# Altium PCB TIPD164_PCB.PcbDoc
Units mil, origin at the board's own origin, x right, y up, seen from the top; angles counter-clockwise.
Board outline 3000 x 3000 mil, 4 copper layers (Top Layer, Mid-Layer 1, Mid-Layer 2, Bottom Layer); 85 components, 50 nets, 262 pads, 186 vias.
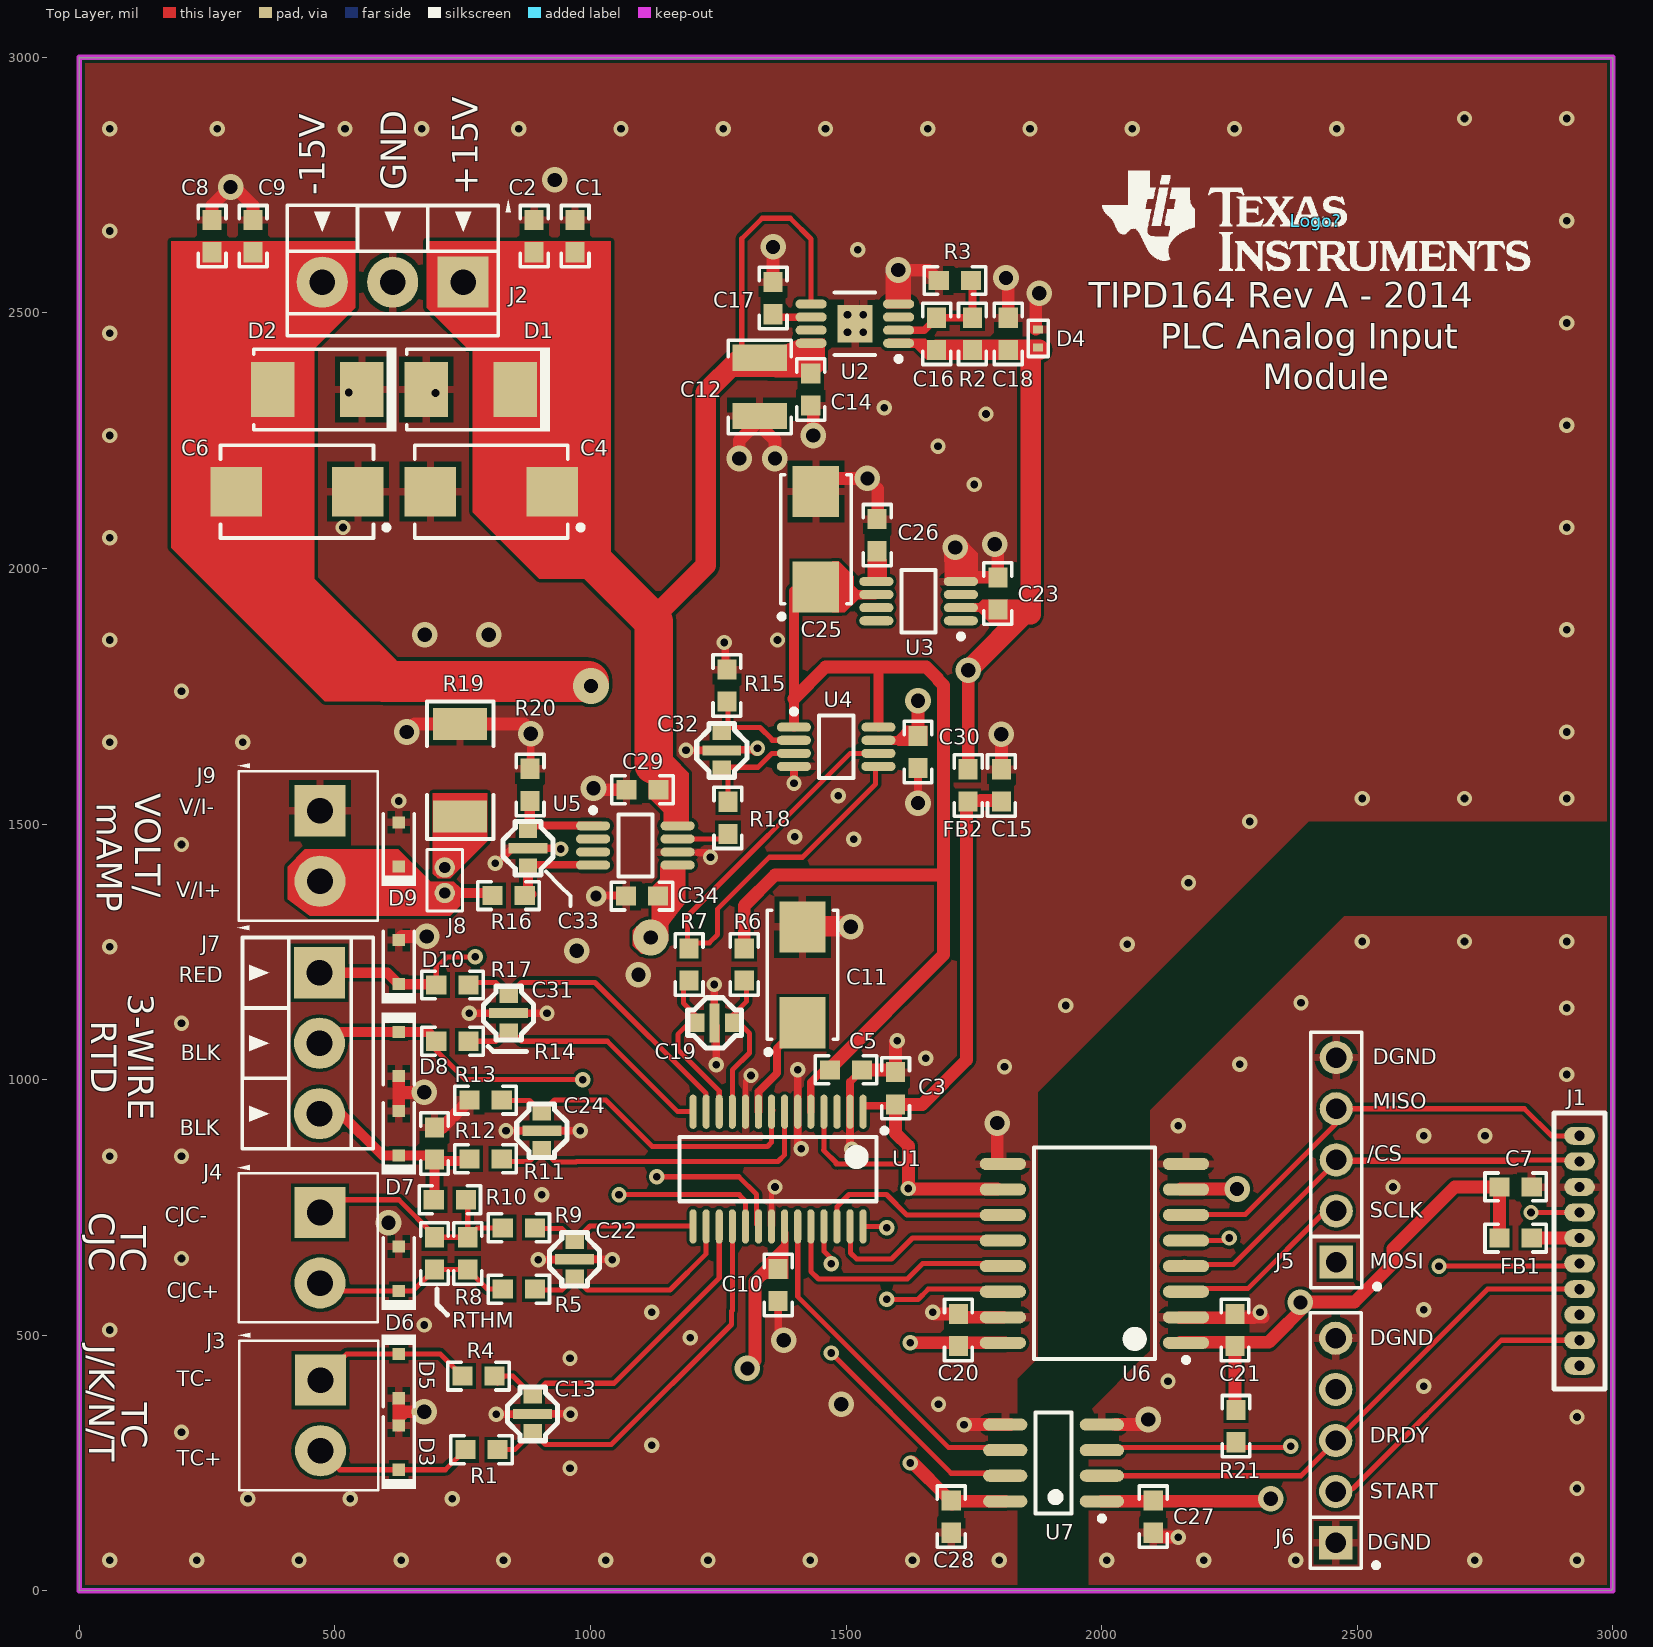
[diagram p0: Top Layer view]
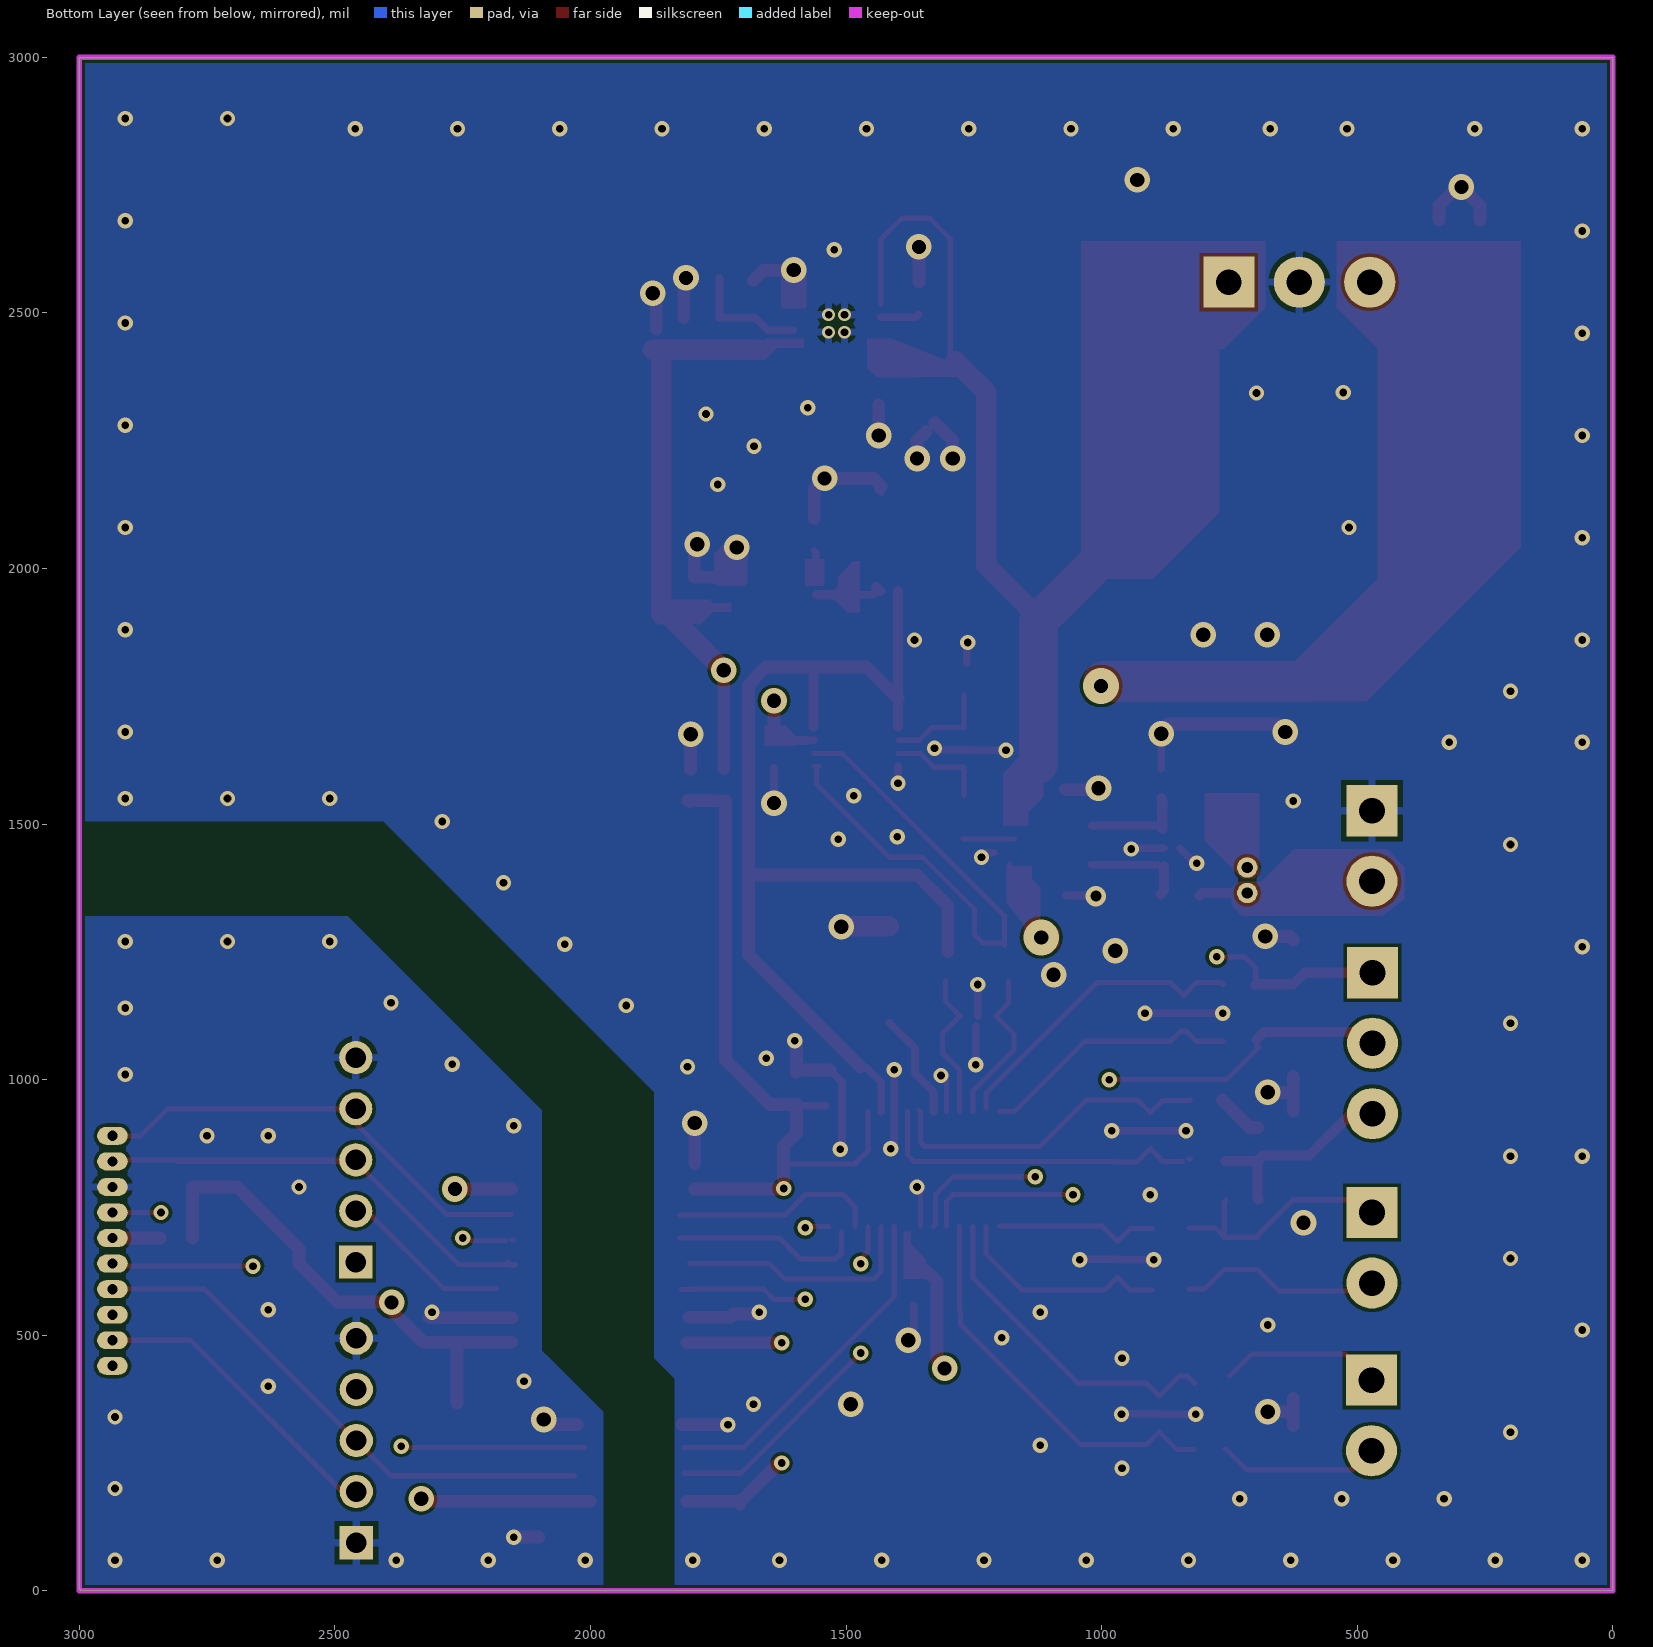
[diagram p1: Bottom Layer view, seen from below]
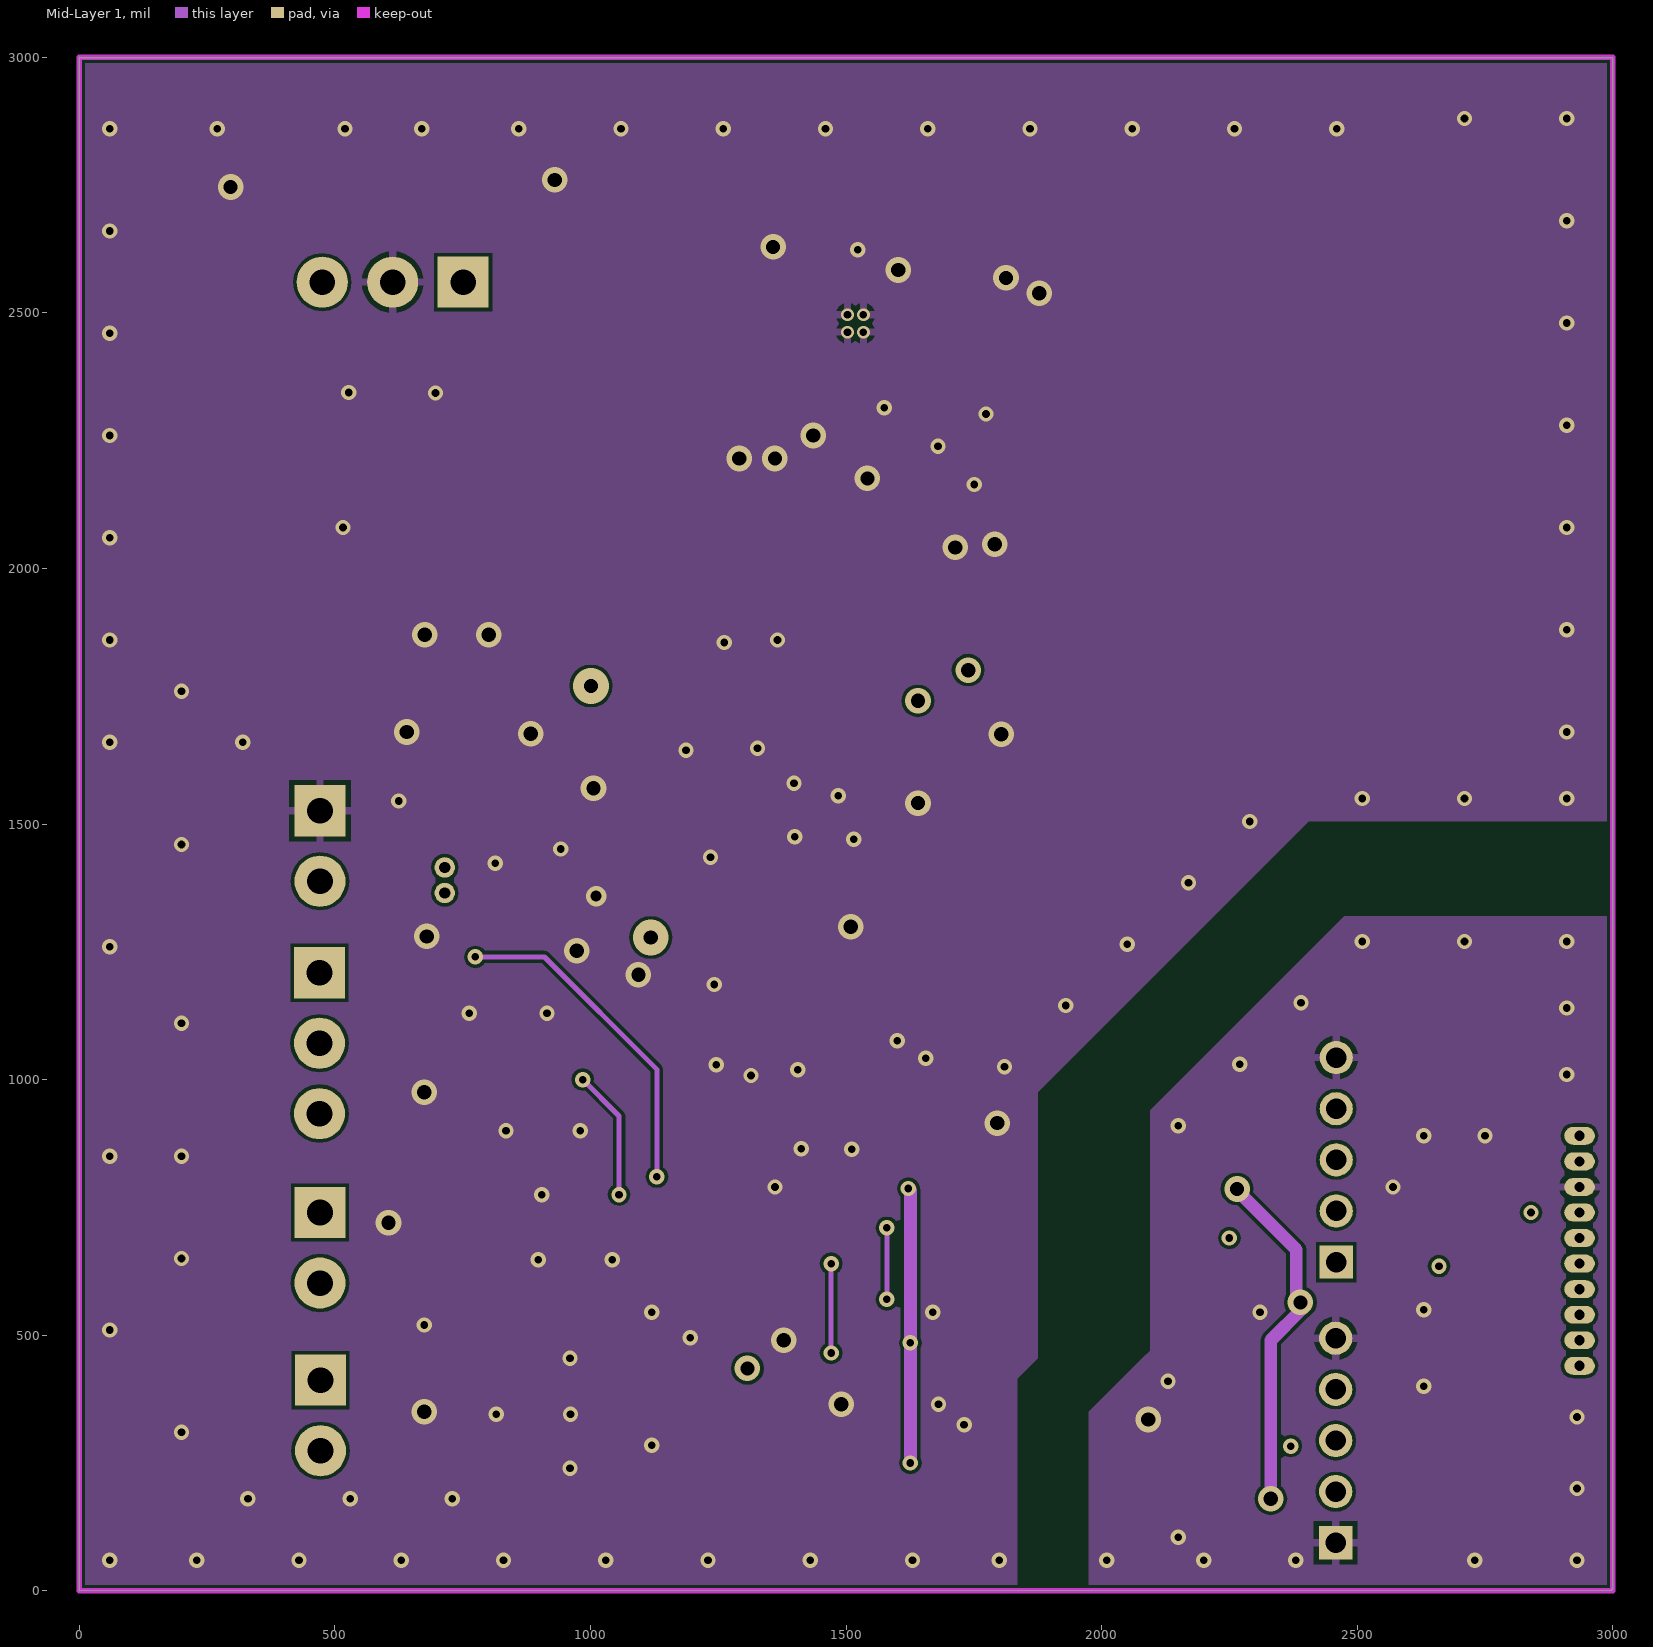
[diagram p2: Mid-Layer 1]
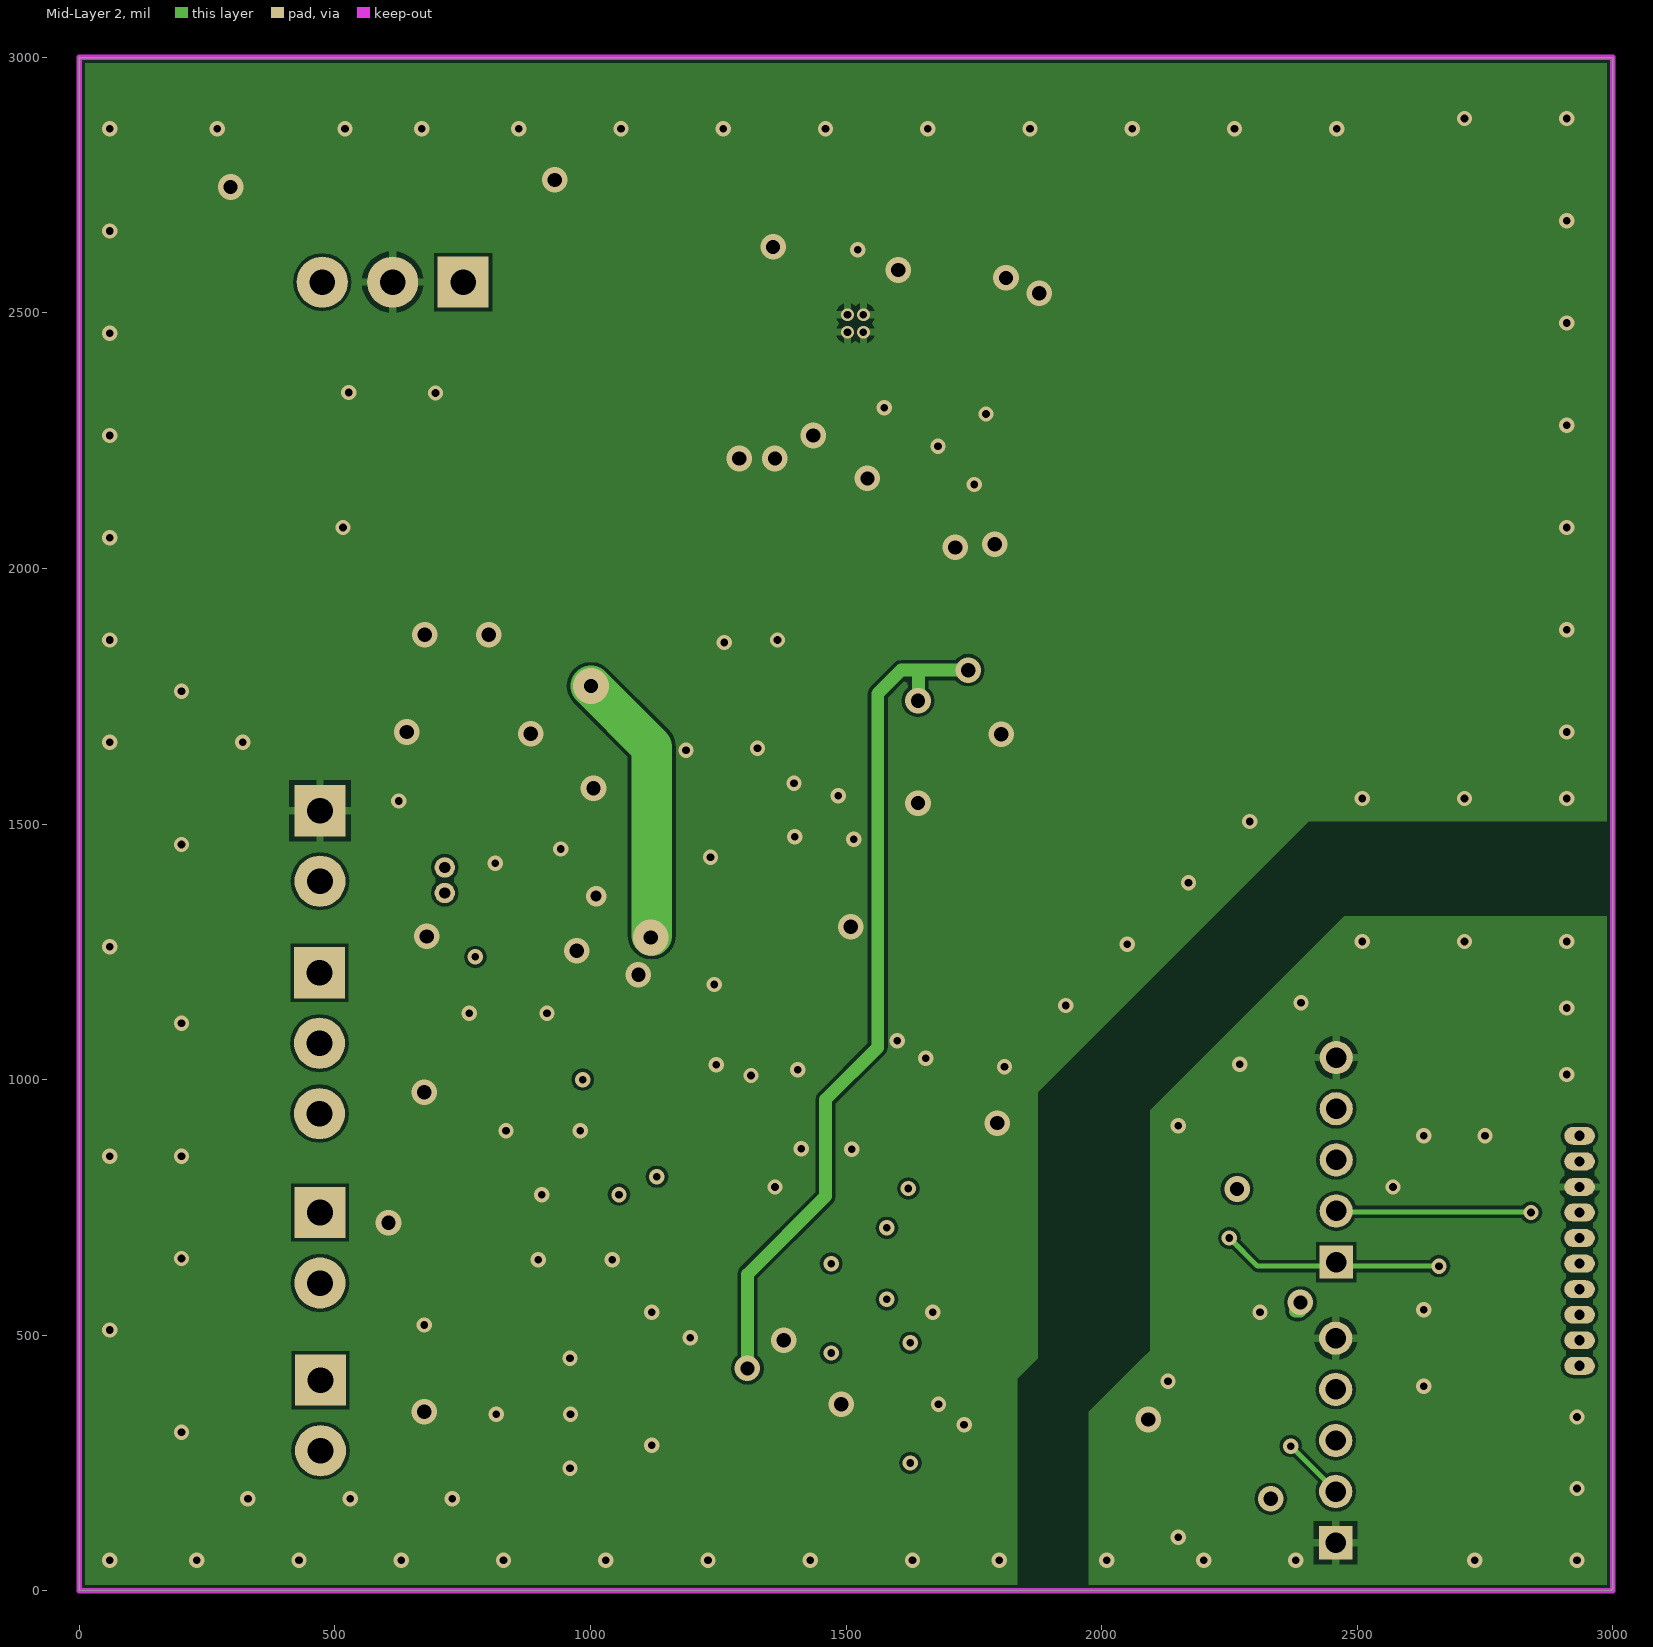
[diagram p3: Mid-Layer 2]

## Layer stack, top to bottom
Top Layer: signal copper 1.4
Dielectric: core 12.6, FR-4, Dk 4.8
Mid-Layer 1: signal copper 1.4
Dielectric: prepreg 12.6, FR-4, Dk 4.8
Mid-Layer 2: signal copper 1.4
Dielectric: core 12.6, FR-4, Dk 4.8
Bottom Layer: signal copper 1.4

## Board outline
2997,1 3000,4 3000,2999 1,2999 0,3000 0,0

## Design rules (kind name [scope] priority, off if disabled: settings)
Clearance [All] p1: gap=6.5
HoleToHoleClearance [All] p1: gap=0 allowstackedmicrovias=TRUE
MinimumSolderMaskSliver [All] p1: minsoldermaskwidth=0
PolygonConnect PolygonConnect_1 [(InComponentClass('All Components'))] p1: connectstyle=Relief reliefconductorwidth=15 reliefentries=4 polygonreliefangle="90 Angle" airgapwidth=10
PolygonConnect [All] p2: connectstyle=Direct reliefconductorwidth=20 reliefentries=4 polygonreliefangle="90 Angle" airgapwidth=10
RoutingVias [All] p1: holewidth=15 width=30 viastyle="Through Hole" minholewidth=15 minwidth=30 maxholewidth=28 maxwidth=50
SilkToSilkClearance [All] p1 off: silktosilkclearance=10
SilkscreenOverComponentPads [All] p1 off: minsilkscreentomaskgap=10
SolderMaskExpansion [All] p1: expansion=4
Width [All] p1: maxlimit=200 minlimit=10 preferedwidth=10
24 further rules are at their usual default settings.

## Classes and differential pairs
component class Header: J5 J6
component class Logo: Logo?

## Components (designator, comment, footprint, x,y, rotation, side; value= is the part's Value field where it differs from the comment)
C1 "GRM188R71H104KA93D" 0603 970,2650 r270 top
C2 "06035A101JAT2A" 0603 890,2650 r90 top
C3 "GRM188R71H104KA93D" 0603 1597,983 r90 top
C4 "293D106X9050E2TE3" 7343-43 806,2150 r180 top
C5 "GRM188R71H104KA93D" 0603 1500,1019 r0 top
C6 "293D106X9050E2TE3" 7343-43 426,2150 r180 top
C7 "GRM188R71H104KA93D" 0603 2810,790 r0 top
C8 "GRM188R71H104KA93D" 0603 260,2650 r90 top
C9 "06035A101JAT2A" 0603 340,2650 r270 top
C10 "GRM188R71H104KA93D" 0603 1367.2,598 r270 top
C11 "293D226X9010C2TE3" 6032-28 1415,1205 r90 top
C12 "C3225X7R1E106M" 1210 1331,2355 r270 top
C13 "0.047uF X2Y" X2Y_0603 887,346 r90 top
C14 "GRM188R71H104KA93D" 0603 1431,2350 r270 top
C15 "GRM188R71H104KA93D" 0603 1804,1575.5 r90 top
C16 "C0603C103J5RACTU" 0603 1677.37,2458.81 r90 top
C17 "C0603C103J5RACTU" 0603 1357.37,2528.81 r90 top
C18 "GRM188R71H104KA93D" 0603 1817.37,2458.81 r90 top
C19 "0.047uF X2Y" X2Y_0603 1243,1111 r0 top
C20 "GRM188R71H104KA93D" 0603 1720,510 r90 top
C21 "GRM188R71H104KA93D" 0603 2261,510 r90 top
C22 "0.047uF X2Y" X2Y_0603 969,648.5 r90 top
C23 "GRM188R71H104KA93D" 0603 1797,1951 r90 top
C24 "0.047uF X2Y" X2Y_0603 905,900 r90 top
C25 "293D226X9010C2TE3" 6032-28 1441,2057 r90 top
C26 "GRM188R71H104KA93D" 0603 1561,2065 r90 top
C27 "GRM188R71H104KA93D" 0603 2101,145 r270 top
C28 "GRM188R71H104KA93D" 0603 1706,145 r270 top
C29 "GRM188R71H104KA93D" 0603 1102,1567 r180 top
C30 "GRM188R71H104KA93D" 0603 1640.8,1641 r270 top
C31 "0.047uF X2Y" X2Y_0603 840,1130 r90 top
C32 "0.047uF X2Y" X2Y_0603 1257,1644 r270 top
C33 "0.047uF X2Y" X2Y_0603 878,1452.5 r90 top
C34 "GRM188R71H104KA93D" 0603 1101,1359 r180 top
D1 "SMBJ15A-13-F" SMB 766,2350 r180 top
D2 "SMBJ15A-13-F" SMB 466,2350 r180 top
D3 "DESD5V0S1BA" SOD-323 625,280 r90 top
D4 "ESD9L5.0ST5G" SOD-923 1876,2450 r270 top
D5 "DESD5V0S1BA" SOD-323 625,420 r270 top
D6 "DESD5V0S1BA" SOD-323 625,630 r90 top
D7 "DESD5V0S1BA" SOD-323 625,895 r90 top
D8 "DESD5V0S1BA" SOD-323 625,1050 r270 top
D9 "CDSOD323-T15SC" sod-323 625,1460 r90 top
D10 "DESD5V0S1BA" SOD-323 625,1230 r90 top
FB1 "BLM18HG601SN1D" 0603 2810,690 r180 top
FB2 "BLM18HG601SN1D" 0603 1739,1575.5 r270 top
J1 "851-43-050-20-001000" 851-43-010-20-001000 2935,665 r180 top
J2 "ED555/3DS" TERM_BLK_ED555-3DS 751,2560 r180 top
J3 "ED555/2DS" TERM_BLK_ED555-2DS 472,412 r270 top
J4 "ED555/2DS" TERM_BLK_ED555-2DS 471,740 r270 top
J5 "TSW-105-07-G-S" TSW-105-07-G-S 2459,843 r90 top
J6 "TSW-105-07-G-S" TSW-105-07-G-S 2458,294 r90 top
J7 "ED555/3DS" TERM_BLK_ED555-3DS 470,1209 r270 top
J8 "TMS-102-02-G-S" "50mil Header" 715,1365 r90 top
J9 "ED555/2DS" TERM_BLK_ED555-2DS 471,1526 r270 top
Logo? "Texas Instruments" TI_Stacked_Overlay_Small 2420,2680 r0 top
R1 "CRCW0603249RFKEA" 0603 787,276 r180 top
R2 "ERA-3AEB1653V" 0603 1747.37,2458.81 r90 top
R3 "RG1608P-5112-B-T5" 0603 1713,2563.19 r0 top
R4 "CRCW0603249RFKEA" 0603 781,420 r180 top
R5 "RG1608P-2490-B-T5" 0603 860,590 r180 top
R6 "CRCW0603249RFKEA" 0603 1301,1225 r270 top
R7 "CRCW0603249RFKEA" 0603 1193,1225 r270 top
R8 "RG1608P-202-B-T5" 0603 760,660 r270 top
R9 "RG1608P-2490-B-T5" 0603 860,710 r180 top
R10 "CRCW06030000Z0EA" 0603 725,765 r0 top
R11 "CRCW0603249RFKEA" 0603 795,845 r180 top
R12 "RG2012V-822-P-T1" 0603 695,875 r90 top
R13 "CRCW0603249RFKEA" 0603 795,960 r180 top
R14 "CRCW0603249RFKEA" 0603 730,1075 r180 top
R15 "MCT06030C1008FP500" 0603 1267,1771 r270 top
R16 "CRCW0603249RFKEA" 0603 840,1360 r0 top
R17 "CRCW0603249RFKEA" 0603 730,1185 r180 top
R18 "MCT06030C1008FP500" 0603 1269,1512 r90 top
R19 "RT2010BKC07249RL" 2010 745,1605 r270 top
R20 "CRCW0603249RFKEA" 0603 882,1576.5 r270 top
R21 "CRCW0603100KFKEA" 0603 2263,322 r90 top
RTHM "NTCS0603E3473FHT" 0603 695,660 r270 top
U1 "ADS1248" MTC28_N 1367.2,825 r270 top
U2 "TPS7A4901" MUY08A_N 1517.37,2478.81 r180 top
U3 "REF5025" MUA08A_N 1642,1936 r180 top
U4 "INA159" MUA08A_N 1480.8,1651 r0 top
U5 "INA826" MUA08A_N 1088,1458 r0 top
U6 "ISO7641FCDW" M16B_N 1986,660 r180 top
U7 "ISO7221BD" D0008A_N 1906,250 r180 top

## Footprints (in the part's own frame and the unit in brackets; to place one, negate y for a bottom-side part, rotate by r counter-clockwise, add the part's x,y. Pads: shape width x height; smd on the part's side, far side on the other; paste and mask are expansions set on the pad)
"50mil Header" [mil]
  round 40 hole 22: 1(0,0) 2(50,0)
  silkscreen extent -35,-35 85,35
0603 [mm] "0603 from SM-752 data"
  rect 1x0.95 smd: 1(-0.8,0) 2(0.8,0)
  silkscreen extent -1.52,-0.69 1.52,0.69, body extent -0.87,-0.47 0.87,0.47, height 0.85
851-43-010-20-001000 [mil] "Female 10 Pin connector for SM-USB-DIG"
  oval 60x35 hole 20: 1(0,225) 2(0,175) 3(0,125) 4(0,75) 5(0,25) 6(0,-25) 7(0,-75) 8(0,-125) 9(0,-175) 10(0,-225)
  silkscreen extent -50,-270 50,270, body extent -210,-257 8,257, height 87
1210 [mm] "1210 from SM-752 data"
  rect 1.3x2.7 smd: 1(-1.45,0) 2(1.45,0)
  silkscreen extent -2.32,-1.57 2.32,1.57, body extent -1.7,-1.35 1.7,1.35, height 1.35
2010 [mm] "Chip Capacitor, Body 5.08x2.54mm, IPC Medium Density"
  rect 1.6x2.7 smd: 1(-2.3,0) 2(2.3,0)
  silkscreen extent -3.42,-1.65 3.42,1.65, body extent -2.73,-1.45 2.73,1.45, height 1.66
6032-28 [mm] "Medium Density IPC based on Vishay Sprague 293D datasheet."
  rect 2.55x2.3 smd: 1(-2.375,0) 2(2.375,0)
  silkscreen extent -3.96,-1.75 3.2,1.82, body extent -3.15,-1.75 3.15,1.75, height 2.8
7343-43 [mm] "Medium density IPC based on Kemet T495 series"
  rect 2.55x2.45 smd: 1(-3.025,0) 2(3.025,0)
  silkscreen extent -4.56,-2.3 3.8,2.3, body extent -3.8,-2.3 3.8,2.3, height 4.3
D0008A_N [mm] "SOIC, 8-Leads, Body 4.9x3.9mm, Pitch 1.27mm, IPC Medium Density"
  oval 2.2x0.6 smd: 1(-2.4,1.905) 2(-2.4,0.635) 3(-2.4,-0.635) 4(-2.4,-1.905) 5(2.4,-1.905) 6(2.4,-0.635) 7(2.4,0.635) 8(2.4,1.905)
  silkscreen extent -2.53,-2.5 0.9,2.88, body extent -2,-2.5 2,2.5, height 1.75
M16B_N [mm] "SOIC, 16-Leads, Body 10.3x7.5mm, Pitch 1.27mm, IPC Medium Density"
  oval 2.3x0.6 smd: 1(-4.55,4.445) 2(-4.55,3.175) 3(-4.55,1.905) 4(-4.55,0.635) 5(-4.55,-0.635) 6(-4.55,-1.905) 7(-4.55,-3.175) 8(-4.55,-4.445) 9(4.55,-4.445) 10(4.55,-3.175) 11(4.55,-1.905) 12(4.55,-0.635) 13(4.55,0.635) 14(4.55,1.905) 15(4.55,3.175) 16(4.55,4.445)
  silkscreen extent -4.67,-5.25 3,5.42, body extent -3.75,-5.25 3.75,5.25, height 2.65
MTC28_N [mm] "TSOP, 28-Leads, Body 9.7x4.4mm, Pitch 0.65mm, IPC Medium Density"
  oval 1.7x0.35 smd: 1(-2.85,4.225) 2(-2.85,3.575) 3(-2.85,2.925) 4(-2.85,2.275) 5(-2.85,1.625) 6(-2.85,0.975) 7(-2.85,0.325) 8(-2.85,-0.325) 9(-2.85,-0.975) 10(-2.85,-1.625) 11(-2.85,-2.275) 12(-2.85,-2.925) 13(-2.85,-3.575) 14(-2.85,-4.225) 15(2.85,-4.225) 16(2.85,-3.575) 17(2.85,-2.925) 18(2.85,-2.275) 19(2.85,-1.625) 20(2.85,-0.975) 21(2.85,-0.325) 22(2.85,0.325) 23(2.85,0.975) 24(2.85,1.625) 25(2.85,2.275) 26(2.85,2.925) 27(2.85,3.575) 28(2.85,4.225)
  silkscreen extent -2.03,-4.9 1.6,5.41, body extent -2.25,-4.9 2.25,4.9, height 1.1
MUA08A_N [mm] "TSOP, 8-Leads, Body 3x3mm, Pitch 0.65mm, IPC Medium Density"
  oval 1.7x0.45 smd: 1(-2.1,0.975) 2(-2.1,0.325) 3(-2.1,-0.325) 4(-2.1,-0.975) 5(2.1,-0.975) 6(2.1,-0.325) 7(2.1,0.325) 8(2.1,0.975)
  silkscreen extent -2.22,-1.55 0.85,1.87, body extent -1.6,-1.6 1.6,1.6, height 1.09
MUY08A_N [mm] "TSOP, 8-Leads, Body 3x3mm, Pitch 0.65mm, Exposed Pad, IPC Medium Density"
  oval 1.55x0.45 smd: 1(-2.175,0.975) 2(-2.175,0.325) 3(-2.175,-0.325) 4(-2.175,-0.975) 5(2.175,-0.975) 6(2.175,-0.325) 7(2.175,0.325) 8(2.175,0.975)
  rect 1.73x1.85 smd: 9(0,0)
  silkscreen extent -2.3,-1.55 1,1.87, body extent -1.55,-1.55 1.55,1.55, height 1.09
SMB [mil] "Molded Diode, 2-Leads, Body 5.4x3.6mm, IPC Medium Density, based on OnSemi component dimensions"
  rect 85x107.99 smd: 1(-87.01,0) 2(87.01,0)
  silkscreen extent -155,-82 125,82, body extent -106,-71 106,71, height 91
SOD-323 [mm] "NXP recommended land pattern"
  rect 0.6x0.6 smd paste-0.05: 1(-1.1,0) 2(1.1,0)
  silkscreen extent -2.06,-0.86 1.53,0.86, body extent -1.3,-0.67 1.3,0.68, height 1.1
sod-323 [mm] "NXP recommended land pattern"
  rect 0.6x0.6 smd paste-0.05: 1(-1.1,0) 2(1.1,0)
  silkscreen extent -2.06,-0.86 1.53,0.86, body extent -1.3,-0.67 1.3,0.68, height 1.1
SOD-923 [mm]
  rect 0.4x0.5 smd: 1(-0.45,0) 2(0.45,0)
  silkscreen extent -0.9,-0.5 0.9,0.5
TERM_BLK_ED555-2DS [mil]
  rect 100x100 hole 50: 1(0,0)
  round 100 hole 50: 2(138,0)
  silkscreen extent -93,-161 215,113, body extent -69,-150 207,106, height 323
TERM_BLK_ED555-3DS [mm]
  rect 2.54x2.54 hole 1.27: 1(0,0)
  round 2.54 hole 1.27: 2(3.5,0) 3(7,0)
  silkscreen extent -2.36,-4.09 8.75,2.67, body extent -1.75,-3.83 8.75,2.67, height 8.2
TI_Stacked_Overlay_Small [mil]
  silkscreen extent -418,-98 418,98
TSW-105-07-G-S [mm] "Samtec 100mil, 1x5, 230 mil above insulator"
  rect 1.65x1.65 hole 1.016 mask+0: 1(-5.08,0)
  round 1.65 hole 1.016 mask+0: 2(-2.54,0) 3(0,0) 4(2.54,0) 5(5.08,0)
  silkscreen extent -6.42,-2.16 6.35,1.27, body extent -6.35,-1.27 6.35,1.27, height 8.38
X2Y_0603 [mil]
  rect 30x36 smd: 1(-35,0) 2(35,0)
  rect 20x76 smd: 3(0,0)
  silkscreen extent -52,-49 52,49

## Part data
C1 C3 C5 C7 C8 C10 C14 C15 C18 C20 C21 C23 C26 C27 C28 C29 C30 C34: "CAP, CERM, 0.1uF, 50V, +/-10%, X7R, 0603"
C2 C9: "CAP, CERM, 100pF, 50V, +/-5%, C0G/NP0, 0603"
C4 C6: "CAP, TANT, 10uF, 50V, +/-10%, 0.8 ohm, 7343-43 SMD"
C11 C25: "CAP, TANT, 22uF, 10V, +/-10%, 1.5 ohm, 6032-28 SMD"
C12: "CAP, CERM, 10uF, 25V, +/-20%, X7R, 1210"
C13 C19 C22 C24 C31 C32 C33: library part "X2Y Capacitor", "CAP CER 0.047UF 16V 20% X7R 0603"
C16 C17: "CAP, CERM, 0.01uF, 50V, +/-5%, X7R, 0603"
D1 D2: "Diode, TVS, Uni, 15V, 600W, SMB"
D3 D5 D6 D7 D8 D10: library part SMAJ15CA, "DIODE TVS 5.0V 130W"
D4: library part SMAJ15CA, "TVS ESD PROT ULT LOW CAP SOD-923"
D9: library part SMAJ15CA, "DIODE TVS ARRAY 15V SOD323"
FB1 FB2: library part Ferrite_Bead, "FERRITE CHIP 600 OHM 200MA 0603"
J1: library part SM-USB-DIG-CONN, "CONN SOCKET 50PIN .050 R/A SNGL"
J2 J7: "Terminal Block, 6A, 3.5mm Pitch, 3-Pos, TH"
J3 J4 J9: "Terminal Block, 6A, 3.5mm Pitch, 2-Pos, TH"
J5 J6: "Header, TH, 100mil, 5x1, Gold plated, 230 mil above insulator"
J8: library part Shunt, "CONN HEADER 2POS .050\" T/H GOLD"
Logo?: library part TI_Logo, "Texas Instrument Corporate Signature"
R1 R4 R6 R7 R11 R13 R14 R16 R17 R20: "RES, 249 ohm, 1%, 0.1W, 0603"
R2: library part RT0603BRD07164KL, "RES 165K OHM 1/10W .1% 0603 SMD"
R3: "RES, 51.1k ohm, 0.1%, 0.1W, 0603"
R5 R9: library part CRCW0603249RFKEA, "RES 249 OHM 1/10W .1% 0603 SMD"
R8: "RES, 2.00k ohm, 0.1%, 0.1W, 0603"
R10: "RES, 0 ohm, 5%, 0.1W, 0603"
R12: library part RC0603FR-078K2L, "RES 8.2k OHM 1/16W .02% 0805"
R15 R18: library part CRCW06031R00FKEA, "RES 1.00 OHM 1/8W 1% SMD 0603"
R19: library part CRCW1206249RFKEA, "RES 249 OHM 1/2W .1% 2010 SMD"
R21: "RES, 100k ohm, 1%, 0.1W, 0603"
RTHM: library part CRCW0603100KJNEA, "THERMISTOR NTC 47K 1% 0603"
U1: "IC ADC 24BIT DEL/SIG LN 28TSSOP"
U2: "IC REG LDO ADJ .15A 8MSOP"
U3: "IC VREF SERIES PREC 2.5V 8-MSOP"
U4: "IC OPAMP DIFF 1.5MHZ SGL 8MSOP"
U5: "IC OPAMP INSTR 1MHZ 8MSOP"
U6: library part ISO7241, "ISOLATOR DGTL 25MBPS 4CH 16SOIC"
U7: "5 Mbps Dual Channels, 1 / 1, Digital Isolator, 3.3 V / 5 V, -40 to +125 degC, 8-pin SOIC (D), Green (RoHS & no Sb/Br)"

## Via types
v1: diameter 30, hole 15, Top Layer to Bottom Layer, 143 vias
v2: diameter 50, hole 28, Top Layer to Bottom Layer, 36 vias
v3: diameter 25, hole 15, Top Layer to Bottom Layer, 4 vias
v4: diameter 70, hole 28, Top Layer to Bottom Layer, 2 vias
v5: diameter 40, hole 22, Top Layer to Bottom Layer, 1 vias

## Nets (pads, with @x,y where several pads share a name; then routed paths per layer and width w, separated by ;. In a path a pad name is that pad's centre, name@x,y a point inside that pad or via, vN(x,y) a via of type N, cw(c..) or ccw(c..) an arc to the next point about the centre after c; other vN are vias at no path point)
+2.5VA: C5.1 C25.1 R6.1 U1.5 U3.6 U4.1 U4.8 | length 2280.4
  Top Layer w15: U1.5 1431.18,994.48 C5.1@1460,1023.3 ; C25.1@1445.7,1948.8 U3.6
  Top Layer w20: U4.1@1398.12,1691.15 1398.12,1745 C25.1@1398.12,1955.61 ; C25.1@1433.12,1955.61 C25.1 ; U4.8@1563.47,1691.15 1563.47,1807
  Top Layer w25: R6.1@1301,1250 1301,1340 1361,1400 1691,1400 ; 1398.12,1745 1460.12,1807 1563.47,1807 1657,1807 1679.5,1784.5 1679.5,1782.98 1691,1771.48 1691,1400 ; C5.1@1471,1024.3 1691,1244.3 1691,1400
+5VA: C10.1 C16.1 C18.1 C23.1 C30.1 D4.2 FB2.1 R2.1 U1.22 U2.1 U3.2 U4.7 | length 3215.6
  Top Layer w15: U4.7 1632.09,1663.8 C30.1
  Top Layer w25: v2(1307.2,435) 1322.2,450 1322.2,605 1344.2,627 C10.1@1372.71,627 ; C30.1 v2(1640.8,1741) ; FB2.1@1739,1608 v2(1739,1801) ; C23.1@1797,1922 1858,1922
  Top Layer w40: C16.1 R2.1 C18.1 D4.2@1877.92,2427.32 ; v2(1739,1801) 1859,1921 ; 1861,1910 1861,2425
  Mid-Layer 2 w25: v2(1307.2,435) 1307.2,619 1460,771.8 1460,961 1562,1063 1562,1755 1608,1801 v2(1739,1801) ; v2(1640.8,1741) 1642,1742.2 1642,1799 ; v2@1739,1799 v2@1750,1799
+15VA: C1.2 C2.1 C4.1 C12.1 C14.1 C29.1 D1.1 J2.1 U2.5 U2.8 U5.8 | length 1665.7
  Top Layer w10: C29.1@1148.5,1560 1179.68,1528.82 ; 1179.68,1518.39 1179.68,1548.82 ; C12.1@1286,2405 1296,2415 1296,2645 1336,2685 1391,2685 1431.74,2644.26 U2.5 ; C12.1@1320.19,2388.81 C12.1@1344.46,2388.81
  Top Layer w40: 1136,1916 1226,2006 1226,2345 C12.1@1286,2405
  Top Layer w75: 1000,2040 1000,2020 1124,1896 1124,1616
-15VA: C6.2 C8.1 C9.2 C34.1 D2.2 J2.3 U5.5 | length 1125.3
  Top Layer w10: v4@1123,1296 1148.5,1321.5 1148.5,1360 1158.5,1360 1179.68,1381.18 U5.5@1179.68,1421.61
  Top Layer w50: J2.3@454.42,2576.68 J2.3@477.09,2554
  Top Layer w80: 595,1779 v4@996,1779
  Mid-Layer 2 w80: v4(1001,1770) 1120,1651 v4@1120,1282
  other v4: 1118,1278
\C\S_DIG: J1.9 J5.3 U6.4 | length 1238.7
  Top Layer w10: U6.4@2146.63,638.5 2257.5,638.5 2459,840 2808,840 ; U6.4@2148.13,636 2154.13,636 U6.4@2161.63,643.5 ; J5.3 2932,843 J1.9
C\S\_AI: U1.24 U6.13 | length 481.4
  Top Layer w10: U1.24 1431.18,624.82 1446,610 1620,610 1650,640 U6.13@1806,640
DGND: C7.2 C21.2 C27.2 J1.8 J5.5 J6.1 J6.5 U6.2 U6.8 U7.4 | length 279.3
  Top Layer w25: U7.4@2026,325 v2@2081,325 ; C27.2@2101,105 v1(2150,105) ; U6.2@2153.63,534 2297,534 2298,535 2316,535 2310,541 v1(2310,545)
  other v1: 2010,60 2200,60 2380,60 2730,60 2930,60 2930,200 2930,340 2630,400 2130,410 2630,550 2570,790 2630,890 2750,890 2150,910 2910,1010 2270,1030 2910,1140 2390,1150 2510,1270 2710,1270 2910,1270
  other v2: 2091,335
DRDY: U1.25 U7.7 | length 696.5
  Top Layer w10: U1.25 1456.77,664.23 1471,650 v1(1471,640) ; v1(1471,465) 1706,230 U7.7@1816.51,230
  Mid-Layer 1 w10: v1(1471,465) v1(1471,640)
DRDY_DIG: J1.4 J6.3 U7.2 | length 1055.2
  Top Layer w10: U7.2@2031,225 2390,225 2755,590 J1.4
DVDD_A: C3.1 C15.1 C20.1 C28.1 FB2.2 U1.1 U1.4 U6.10 U6.16 U7.8 | length 2376
  Top Layer w10: 1456,862 1483.23,834.77 ; 1456.77,862 U1.4 ; 1481,835 1619,835
  Top Layer w15: U1.1@1540,949 C3.1@1589.32,949
  Top Layer w25: v1(1626,485) U6.16 U6.16@1811,485 ; v1@1628.5,252.5 C28.1@1699.5,181.5 ; C28.1@1707.5,170 1712.5,175 U7.8 ; 1764,1546.5 C15.1@1809,1546.5 ; U6.10@1795.87,786 1623,786 v1(1622,787) 1622,870 1597,895 C3.1 1649,951.5 1736,1038.5 1736,1545.5 1802.5,1545.5 C15.1
  Mid-Layer 1 w25: v1(1622,787) 1626,783 v1(1626,485) v1(1626,250)
GNDA: C1.1 C2.2 C3.2 C4.2 C5.2 C6.1 C8.2 C9.1 C10.2 C11.2 C12.2 C13.3 C14.2 C15.2 C17.2 C18.2 C19.3 C20.2 C22.3 C23.2 C24.3 C25.2 C26.2 C28.2 C29.2 C30.2 C31.3 C32.3 C33.3 C34.2 D1.2 D2.1 D3.2 D4.1 D5.2 D6.2 D7.2 D8.2 D9.2 D10.2 J2.2 J9.1 R3.1 R12.2 R13.2 R15.1 R19.1 R20.1 U1.2 U1.6 U1.10 U1.21 U2.4 U2.9 U3.4 U4.4 U5.6 U6.9 U6.15 U7.5 | length 4169.7
  Top Layer w10: v1@940.5,1452.5 v1(942,1451) ; U1.10 1303.23,997.02 v1(1314.2,1008) ; U1.21 1354.41,782.8 1352.2,785 1357.2,790 v1(1361.2,790)
  Top Layer w15: v1(763,1130) C31.3@838,1130 ; v1@815.5,1421.5 C33.3@846,1452 ; v1(816,345) 886,345 C13.3 960,346 v1(961,345) ; v1(835,900) v1(980,900) ; C31.3 v1(915,1130) ; C33.3 v1@940.5,1452.5 ; R20.1@883,1608 v2(883,1676.5) v2@883,1682.5 ; v1(898,647.5) 968,647.5 C22.3 1042,648.5 v1(1043,647.5) ; v5@1001,1360 C34.2@1069.5,1360 ; v1(1187,1644) C32.3 C32.3@1269,1644 ; 1211,1444 1226,1444 v1(1235,1435) ; C19.3@1242,1124.5 v1(1242,1186) ; v1(1246,1029) C19.3@1246,1104 ; C32.3@1258.5,1645.5 v1@1324.5,1645.5 ; R15.1@1264,1815 v1@1264,1855 ; C10.2@1367.2,558.5 1367.2,490 v2(1378.2,490) ; v1(1398.12,1580) U4.4 ; v1(1405.59,1019) U1.6 1405.59,871.61 v1(1412.2,865) ; C25.2@1432,2149.5 C25.2@1437,2154.5 ; v1(1511.2,864) 1507.95,867.25 U1.2 1507.95,995.46 C5.2 ; v2(1602.37,2583.81) 1603,2583.19 U2.4 ; v2(1640.8,1541) C30.2 ; U3.4 U3.4@1726,1975.71
  Top Layer w25: C8.2 260,2710 300,2750 340,2710 C9.1 ; D3.2 625,339 ; D5.2 625,339 ; D7.2 625,975 ; D8.2 625,975 ; D10.2 631.69,1280 v2(680,1280) ; v2(641,1680) 656.55,1695.55 750,1695.55 869.95,1695.55 v2@883,1682.5 ; v2(675,350) 636,350 625,339 ; v2@680,975 625,975 ; R12.2 710,906.5 R13.2 ; v2@1004,1580 1017,1567 C29.2 ; v2@1291,2227.91 1291,2250 C12.2@1326,2285 ; v1@1324.5,1645.5 v1(1327,1648) ; 1343.09,2267.91 1361,2250 v2(1361,2215) ; C17.2 v2(1357.37,2628.81) ; C25.2@1431,2160.5 1446.5,2176 v2(1542,2176) v2@1552,2166 ; v2@1436,2251.5 C14.2@1436,2320 ; C5.2 C3.2@1580,1019 ; C26.2@1562,2097.5 1562,2156 ; C3.2 v1@1597,1073 ; v2@1603,2583.19 1661.5,2583.19 R3.1 ; v1(1670,545) 1673.5,541.5 C20.2 1726.5,535 U6.15 ; v1(1731,325) U7.5@1821.51,325 ; 1753.5,1982.5 C23.2 1797,2041 v2(1791,2047) ; U6.9@1795.87,836 v2@1795.87,917 ; C15.2 v2(1804,1675.5) ; C18.2 v2@1817.37,2548.81 ; D4.1@1871,2467.72 v2@1871,2525 ; v2@1883,2528.19 v2@1888,2533.19
  Top Layer w40: C11.2@1416.5,1300 1510,1300 v2(1509,1299)
  other v1: 60,60 230,60 430,60 630,60 830,60 1030,60 1230,60 1430,60 1630,60 1800,60 330,180 530,180 730,180 960,240 1120,285 200,310 1681,365 960,455 1195,495 60,510 675,520 1120,545 200,650 905,775 60,850 200,850 1810,1025 1656,1042 1600,1076 200,1110 1930,1145 60,1260 2050,1265 2170,1385 814,1423 200,1460 1515,1470 1400,1475 2290,1505 625,1545 2510,1550 2710,1550 2910,1550 1485,1555 60,1660 320,1660 2910,1680 200,1760 1262,1855 60,1860 1366,1860 2910,1880 60,2060 516,2080 2910,2080 1751,2164 1680,2239 60,2260 2910,2280 1774,2302 1575,2314 697.09,2343 527.09,2344 60,2460 2910,2480 1523,2623.19 60,2660 2910,2680 60,2860 270,2860 520,2860 670,2860 860,2860 1060,2860 1260,2860 1460,2860 1660,2860 1860,2860 2060,2860 2260,2860 2460,2860 2710,2880 2910,2880
  other v2: 1491,365 605,720 1796,915 675,975 1094,1205 973,1252 1006,1570 676,1870 801,1870 1714,2041 1291,2215 1436,2260 1878,2538.19 1813,2568.19 296.09,2746.09 930,2760
  other v3: 1503,2462.19 1534,2462.19 1503,2496.19 1534,2496.19
  other v5: 1011,1359
IEXC1: D10.1 J7.1 R17.2 U1.20 | length 1286.9
  Top Layer w10: R17.2 698.5,1218.5 720,1240 v1(775,1240) ; v1(1130,810) 1290.2,810 1325.2,775 1325.2,716.41 U1.20
  Top Layer w20: J7.1 602.69,1209 D10.1 696.81,1186.69 R17.2
  Mid-Layer 1 w10: v1(775,1240) 910,1240 1130,1020 v1(1130,810)
IEXC2: D8.1 J7.2 R14.2 U1.19 | length 1137.5
  Top Layer w10: R14.2@691.81,1063.19 R14.2@696.81,1058.19 ; R14.2@696.81,1078.31 R14.2@696.81,1058.19 ; v1(985,1000) 755,1000 R14.2@696.81,1058.19 ; v1(1056,775) 1291.2,775 ; 1291.2,774 1303.23,761.98 U1.19
  Top Layer w20: J7.2 492.1,1093.31 D8.1 681.81,1093.31 R14.2@696.81,1078.31
  Mid-Layer 1 w10: v1(985,1000) 1056,929 v1(1056,775)
MISO_DIG: J1.10 J5.4 U6.6 | length 905.5
  Top Layer w10: U6.6@2154.13,736 2281,736 2459,914 J5.4 2827,943 2880,890 J1.10
MOSI_DIG: J1.5 J5.1 U6.5 | length 811.8
  Top Layer w10: U6.5@2148.13,686 U6.5@2154.13,686 ; U6.5 2245,685 v1(2250,690) ; v1@2651,635 2930,635 J1.5
  Mid-Layer 2 w10: v1(2250,690) 2305,635 v1(2660,635)
NetC11_1: C11.1 U1.9 | length 210
  Top Layer w15: U1.9 1328.82,976.61 1365,1012.8 1365,1061.5 C11.1
NetC13_1: C13.1 R1.1 U1.18 | length 772.2
  Top Layer w10: R1.1 852,276 C13.1 912,286 1041,286 1276,521 1276,547 1277.64,548.64 U1.18
NetC13_2: C13.2 R4.1 U1.17 | length 652
  Top Layer w10: R4.1@818.5,406 832.5,420 848,420 C13.2 912,406 1046,406 1252.05,612.05 U1.17
NetC16_2: C16.2 R2.2 R3.2 U2.2 | length 231.4
  Top Layer w15: U2.2 1653.08,2466.02 C16.2 R2.2 R3.2@1747.37,2567.32
NetC17_1: C17.1 U2.6 | length 76.7
  Top Layer w15: C17.1 1363.08,2491.61 U2.6
NetC19_1: C19.1 R7.2 U1.12 | length 313.6
  Top Layer w10: 1171,1087.5 1171,1058.63 1252.05,977.58 U1.12 ; 1171,1088.5 1207,1124.5 1182,1149.5 R7.2@1182,1193.01
NetC19_2: C19.2 R6.2 U1.11 | length 295.3
  Top Layer w10: U1.11 1277.64,1018.64 1311,1052 1311,1090.5 1277,1124.5 1305,1152.5 R6.2@1305,1193
NetC22_1: C22.1 R5.1 U1.16 | length 429.6
  Top Layer w10: R5.1@900.5,588.5 944,588.5 C22.1 994,588.5 1155.46,588.5 ; 1155.46,588.25 1226.46,659.25 U1.16
NetC22_2: C22.2 R9.1 U1.15 | length 323.3
  Top Layer w10: R9.1@900.5,708.5 944,708.5 C22.2 999.29,713.8 U1.15@1200.87,713.8
NetC26_1: C26.1 U3.5 | length 61.2
  Top Layer w15: U3.5 1559.32,2031.83 C26.1@1562,2034.5
NetC31_1: C31.1 R14.1 U1.14 | length 513
  Top Layer w10: R14.1 815,1075 835,1095 C31.1 845,1095 865,1075 1033,1075 1170.8,937.2 U1.14
NetC31_2: C31.2 R17.1 U1.13 | length 605.5
  Top Layer w10: R17.1 766.5,1190 815,1190 C31.2 865,1190 1009,1190 1226.46,972.54 U1.13@1226.46,944.91
NetC32_1: C32.1 R15.2 U4.2 | length 203.6
  Top Layer w10: R15.2@1269,1752.5 1269,1689 1332,1689 1356.2,1664.8 ; 1355.2,1663.8 U4.2
NetC32_2: C32.2 R18.2 U4.3 | length 195.9
  Top Layer w10: R18.2@1269,1555.5 1269,1611 1328,1611 1355.2,1638.2 U4.3
NetC33_1: C33.1 R16.2 U5.4 | length 190.4
  Top Layer w15: C33.1@891,1420 U5.4@1019.94,1420
  Top Layer w20: C33.1@880.65,1414.85 C33.1 878,1369 R16.2@884.5,1362.5
NetC33_2: C33.2 R20.2 U5.1 | length 195.6
  Top Layer w10: C33.2 C33.2@881.39,1490.89
  Top Layer w15: C33.2@890,1497 U5.1@1018.94,1497
  Top Layer w20: C33.2@881.39,1490.89 881.39,1538.87 879,1541.26 R20.2@883,1551.01
NetD3_1: D3.1 J3.2 R1.2 | length 318.1
  Top Layer w10: J3.2 509.31,236.69 636,236.69 716.2,236.69 R1.2 ; R1.2@756.25,275.25 R1.2@758.31,277.31
NetD5_1: D5.1 J3.1 R4.2 | length 316.7
  Top Layer w10: J3.1 523.31,463.31 636,463.31 706.2,463.31 R4.2
NetD6_1: D6.1 J4.2 R5.2 R8.2 RTHM.2 | length 397.1
  Top Layer w10: J4.2 486.31,586.69 D6.1 653.19,586.69 RTHM.2 R8.2 798.5,590 R5.2
NetD7_1: D7.1 J7.3 R10.1 R11.2 R12.1 | length 404.1
  Top Layer w20: J7.3 511.59,933.41 593.31,851.69 D7.1 684.31,851.69 R12.1@693.75,842.25 ; R10.1 695,766.5 R12.1@695,841 ; R12.1 R12.1@695,841 ; R11.2@758.5,841 R12.1@695,841
NetD9_1: D9.1 J8.1 J9.2 R16.1 | length 284.3
  Top Layer w20: J8.1 803.5,1365 R16.1
  Top Layer w50: J9.2@451,1380 639.74,1380
NetFB1_1: FB1.1 J1.6 | length 93.5
  Top Layer w25: FB1.1 J1.6
NetJ4_1: J4.1 R8.1 R9.2 R10.2 RTHM.1 | length 483
  Top Layer w10: J4.1 496,765 625,765 695,695 RTHM.1 R8.1 ; R10.2 760,761.5 R8.1 ; R9.2 778.5,710 R8.1
NetJ8_2: J8.2 R19.2
NetR7_1: R7.1 U4.5 U4.6 | length 1134.9
  Top Layer w10: R7.1@1190,1262 1190,1320 1508.2,1638.2 U4.6 ; R7.1@1190,1267.5 1232.5,1267.5 1249,1284 1249,1334 1350,1435 1415,1435 1558,1578 U4.5@1558,1612.61 ; U4.5@1552.41,1612.61 U4.5
NetR18_1: R18.1 U5.7 | length 100.3
  Top Layer w10: U5.7 R18.1@1271,1470.8
REFN1: C24.2 R13.1 U1.8 | length 653.7
  Top Layer w10: R13.1 827.5,959 881,959 C24.2 930,960 1030,960 1121,869 1346.2,869 1354.41,877.2 U1.8 U1.8@1357.2,940
REFP1: C24.1 R11.1 U1.7 | length 653.3
  Top Layer w10: R11.1 R11.1@830,845 ; R11.1@841.5,840 880,840 C24.1 931,839 972,839 973,840 1367.2,840 1380,852.8 U1.7
SCLK_AI: U1.28 U6.14 | length 448.9
  Top Layer w10: U1.28 1577.2,712.8 v1(1580,710) ; v1(1580,570) 1641,570 1661,590 U6.14@1806,590 ; U6.14@1795.87,589 U6.14@1822.87,589
  Mid-Layer 1 w10: v1(1580,570) v1(1580,710)
SCLK_DIG: J1.7 J5.2 U6.3 | length 816.1
  Top Layer w10: U6.3@2183.13,591 2286,591 2438,743 J5.2 ; v1(2840,740) J1.7
  Mid-Layer 2 w10: J5.2@2461,741 v1@2839,741
  Bottom Layer w10: J5.2 J5.2@2461,741 ; v1@2839,741 v1(2840,740)
SDI_AI: U1.27 U6.12 | length 381
  Top Layer w10: U1.27@1509,703 1509,661 1521,649 1589,649 1630,690 U6.12@1826,690
SDO_AI: U1.26 U6.11 | length 408.6
  Top Layer w10: U1.26 1482.36,751.36 1506,775 1579,775 1619,735 1716,735 U6.11@1826,735
START: U1.23 U7.6 | length 670.7
  Top Layer w10: U1.23 1405.59,575.41 1701,280 U7.6@1816.51,280
START_DIG: J1.2 J6.2 R21.1 U7.3 | length 1089.3
  Top Layer w10: U7.3@2011,280 v1@2370,280 ; J6.2@2450,200 2492,200 2782,490 J1.2
  Mid-Layer 2 w10: v1(2370,283) J6.2@2458.5,194.5
VDUT: C7.1 C21.1 C27.1 FB1.2 R21.2 U6.1 U6.7 U7.1 | length 2078.7
  Top Layer w25: U7.1 v2@2326,175 ; U6.1@2154.13,486 2327,486 2406,565 2495,565 2570,640 2570,669 2691,790 C7.1 FB1.2 ; U6.7@2154.13,786 v2@2255,786 ; R21.2@2261,367.5 C21.1
  Mid-Layer 1 w25: v2@2277,771 2381,667 v2@2381,565 ; v2(2331,180) 2331,490 v2@2391,550
  Mid-Layer 2 w25: v2@2388,547 2379,547 2389,557 v2(2389,564)
  other v2: 2265,786
pads on no net: J1.1 J1.3 J6.4 U1.3 U2.3 U2.7 U3.1 U3.3 U3.7 U3.8 U5.2 U5.3

## Polygon pours and split planes (outlines as drawn)
GNDA on Top Layer "GNDA-Top" (solid, remove dead copper, pour order 12): 1835,0 1835,415 1875,455 1875,975 2090,1190 2405,1505 3000,1505 3000,2999 2999,3000 0,3000 0,0
DGND on Top Layer "DGND-Top" (solid, remove dead copper, pour order 16): 1975,0 1975,350 2080,455 2095,470 2095,940 2475,1320 3000,1320 3000,-1
DGND on Bottom Layer "DGND-Bot" (solid, remove dead copper, pour order 15): 1975,0 1975,350 2080,455 2095,470 2095,940 2475,1320 3000,1320 3000,-1
GNDA on Bottom Layer "GNDA-Bot" (solid, remove dead copper, pour order 11): 1835,0 1835,415 1875,455 1875,975 2090,1190 2405,1505 3000,1505 3000,2999 2999,3000 0,3000 0,0
GNDA on Mid-Layer 1 "GNDA-Mid1" (solid, remove dead copper, pour order 10): 1835,0 1835,415 1875,455 1875,975 2090,1190 2405,1505 3000,1505 3000,2999 2999,3000 0,3000 0,0
DGND on Mid-Layer 1 "DGND-Mid1" (solid, remove dead copper, pour order 14): 1975,0 1975,350 2080,455 2095,470 2095,940 2475,1320 3000,1320 3000,-1
GNDA on Mid-Layer 2 "GNDA-Mid2" (solid, remove dead copper, pour order 9): 1835,0 1835,415 1875,455 1875,975 2090,1190 2405,1505 3000,1505 3000,2999 2999,3000 0,3000 0,0
DGND on Mid-Layer 2 "DGND-Mid2" (solid, remove dead copper, pour order 13): 1975,0 1975,350 2080,455 2095,470 2095,940 2475,1320 3000,1320 3000,-1

## Keep-outs
Keep-Out Layer:
  lines w10: 3000,2999 3000,0 0,0 0,3000 3000,3000

## Other copper
Top Layer:
  region net NetJ8_2: 692,1403 701,1394 726,1394 798,1466 798,1560 692,1560
  region net +15VA: 1040,2640 1040,2020 1000,1980 900,1980 770,2110 770,2430 760,2430 680,2510 680,2640
  region net -15VA: 540,2510 460,2430 460,1980 620,1820 620,1740 480,1740 180,2040 180,2640 540,2640
  region net -15VA: 1137,1417 1137,1393 1120,1376 1120,1308.5 1099,1308 1083,1292 1083,1262 1099,1246 1129,1246 1152.5,1270.5 1152,1271 1152,1301 1151,1300 1155,1307 1186,1346 1186,1417
  region net +5VA: 1387.2,702 1387.2,610 1344.2,610 1344.2,650 1373.2,679 1373.2,702
  region net +15VA: 1143,1497 1143,1523 1114,1552 1114,1592 1094,1629 1088,1631 1162,1631 1192,1599 1192,1497
  region net +5VA: 1582.37,2448.81 1582.37,2431.81 1634.37,2431.81 1658.37,2407.81 1685.37,2407.81 1685.37,2446.81 1658.37,2446.81 1656.37,2448.81
  region net +15VA: 1409.29,2448.93 1276,2395 1281,2375 1439.19,2372.5 1458,2391.3 1458,2448.93
  region net +5VA: 1724,1932 1724,1915 1760,1915 1785,1890 1866,1900 1877,1939 1767,1939 1760,1932
  region net +2.5VA: 1559,1957 1559,1940 1524,1940 1498,1914 1473,1914 1473,2014 1486,2014 1515,1985 1515,1966 1524,1957
  region net GNDA: 1580,2509.19 1625,2509.19 1627,2511.19 1627,2592.19 1615,2604.19 1592,2604.19 1578,2590.19 1578,2511.19
  region net GNDA: 1702,2063 1692,2053 1693,1972 1699,1966 1751,1966 1758,1973 1758,2030 1725,2063
  region net NetC26_1: 1580,2018 1580,1966 1543,1966 1543,2018
  region net +5VA: 1574,1672 1598,1672 1618,1692 1659,1692 1659,1653 1601,1653 1599,1655 1574,1655
  region net NetD9_1: 408,1353.25 408,1416.8 440.88,1451 624,1451 688,1387 733,1387 745,1375 745,1340 726,1321 451,1321

## Silkscreen, mask and mechanical layers (free items; w line width, h text height)
Top Overlay:
  lines w8: 913,1407 940.86,1379.14 961,1359 961,1340
  lines w10: 700,590 700,560 720,540 ; 800,1065 810,1055 875,1055
  text "GND" at 640,2740 h50 r90
  text "-15V" at 480,2730 h50 r90
  text "+15V" at 780,2730 h50 r90
  text "TIPD164 Rev A - 2014" at 1975,2510 h50
  text "PLC Analog Input" at 2115,2430 h50
  text "Module" at 2315,2350 h50
  text "VOLT/" at 110,1560 h50 r270
  text "mAMP" at 34,1542 h50 r270
  text "V/I-" at 196,1519 h30
  text "V/I+" at 190,1357 h30
  text "RED" at 195,1190 h30
  text "3-WIRE" at 96,1168 h50 r270
  text "RTD" at 24,1115 h50 r270
  text "BLK" at 199,1038 h30
  text "DGND" at 2530,1030 h30
  text "MISO" at 2530,943 h30
  text "BLK" at 197,891 h30
  text "/CS" at 2520,840 h30
  text "CJC" at 20,740 h50 r270
  text "SCLK" at 2525,730 h30
  text "CJC-" at 167,720 h30
  text "TC" at 81,713 h50 r270
  text "MOSI" at 2525,630 h30
  text "CJC+" at 171,572 h30
  text "J/K/N/T" at 20,481 h50 r270
  text "DGND" at 2525,480 h30
  text "TC-" at 191,400 h30
  text "TC" at 83,368 h50 r270
  text "DRDY" at 2525,290 h30
  text "TC+" at 191,245 h30
  text "START" at 2525,180 h30
  text "DGND" at 2520,80 h30
Top Solder:
  lines w10: 0,0 0,3000 3000,3000 3000,0 0,0
Mechanical 1:
  lines w10: 4.91,-69.01 4.91,-49.01 ; 64.91,-79.01 4.91,-59.01 ; 64.91,-39.01 4.91,-59.01 ; 1224,-59.01 4.91,-59.01 ; 1785.83,-59.01 3004.91,-59.01 ; 2944.91,-79.01 3004.91,-59.01 ; 2944.91,-39.01 3004.91,-59.01 ; 3004.91,-69.01 3004.91,-49.01
  text "3000 (mil)" at 1234,-95 h60

## Dimensions
2951,3000 to 2881,0 on Mechanical 1
-6.04,2967 to 2993.96,3157 on Mechanical 1